# Altium PCB Acoustics_4.PcbDoc
Units mil, origin at the board's own origin, x right, y up, seen from the top; angles counter-clockwise.
Board outline 2756 x 2440 mil, 2 copper layers (Top Layer, Bottom Layer); 113 components, 82 nets, 362 pads, 90 vias.
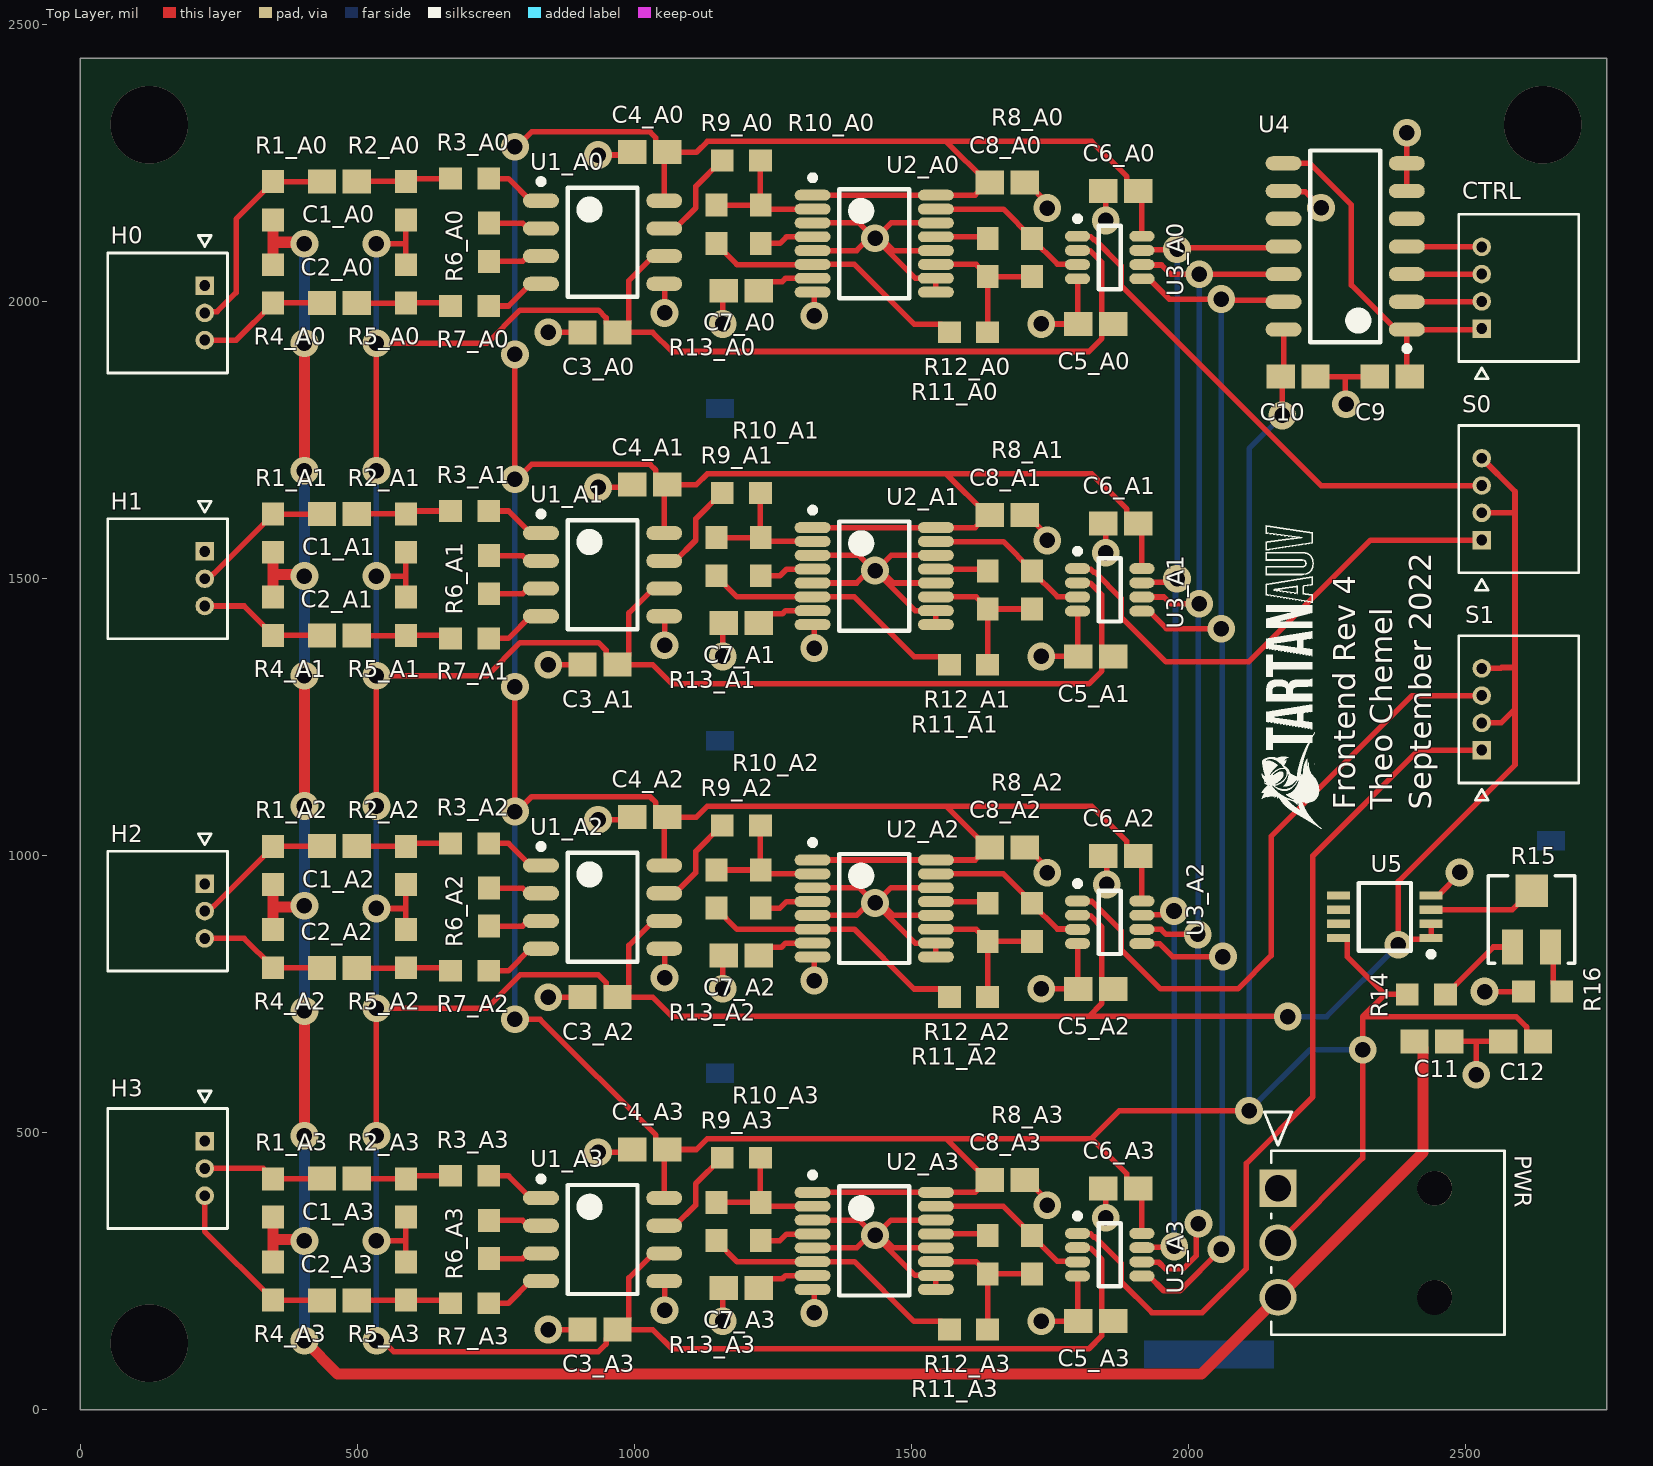
[diagram p0: Top Layer view]
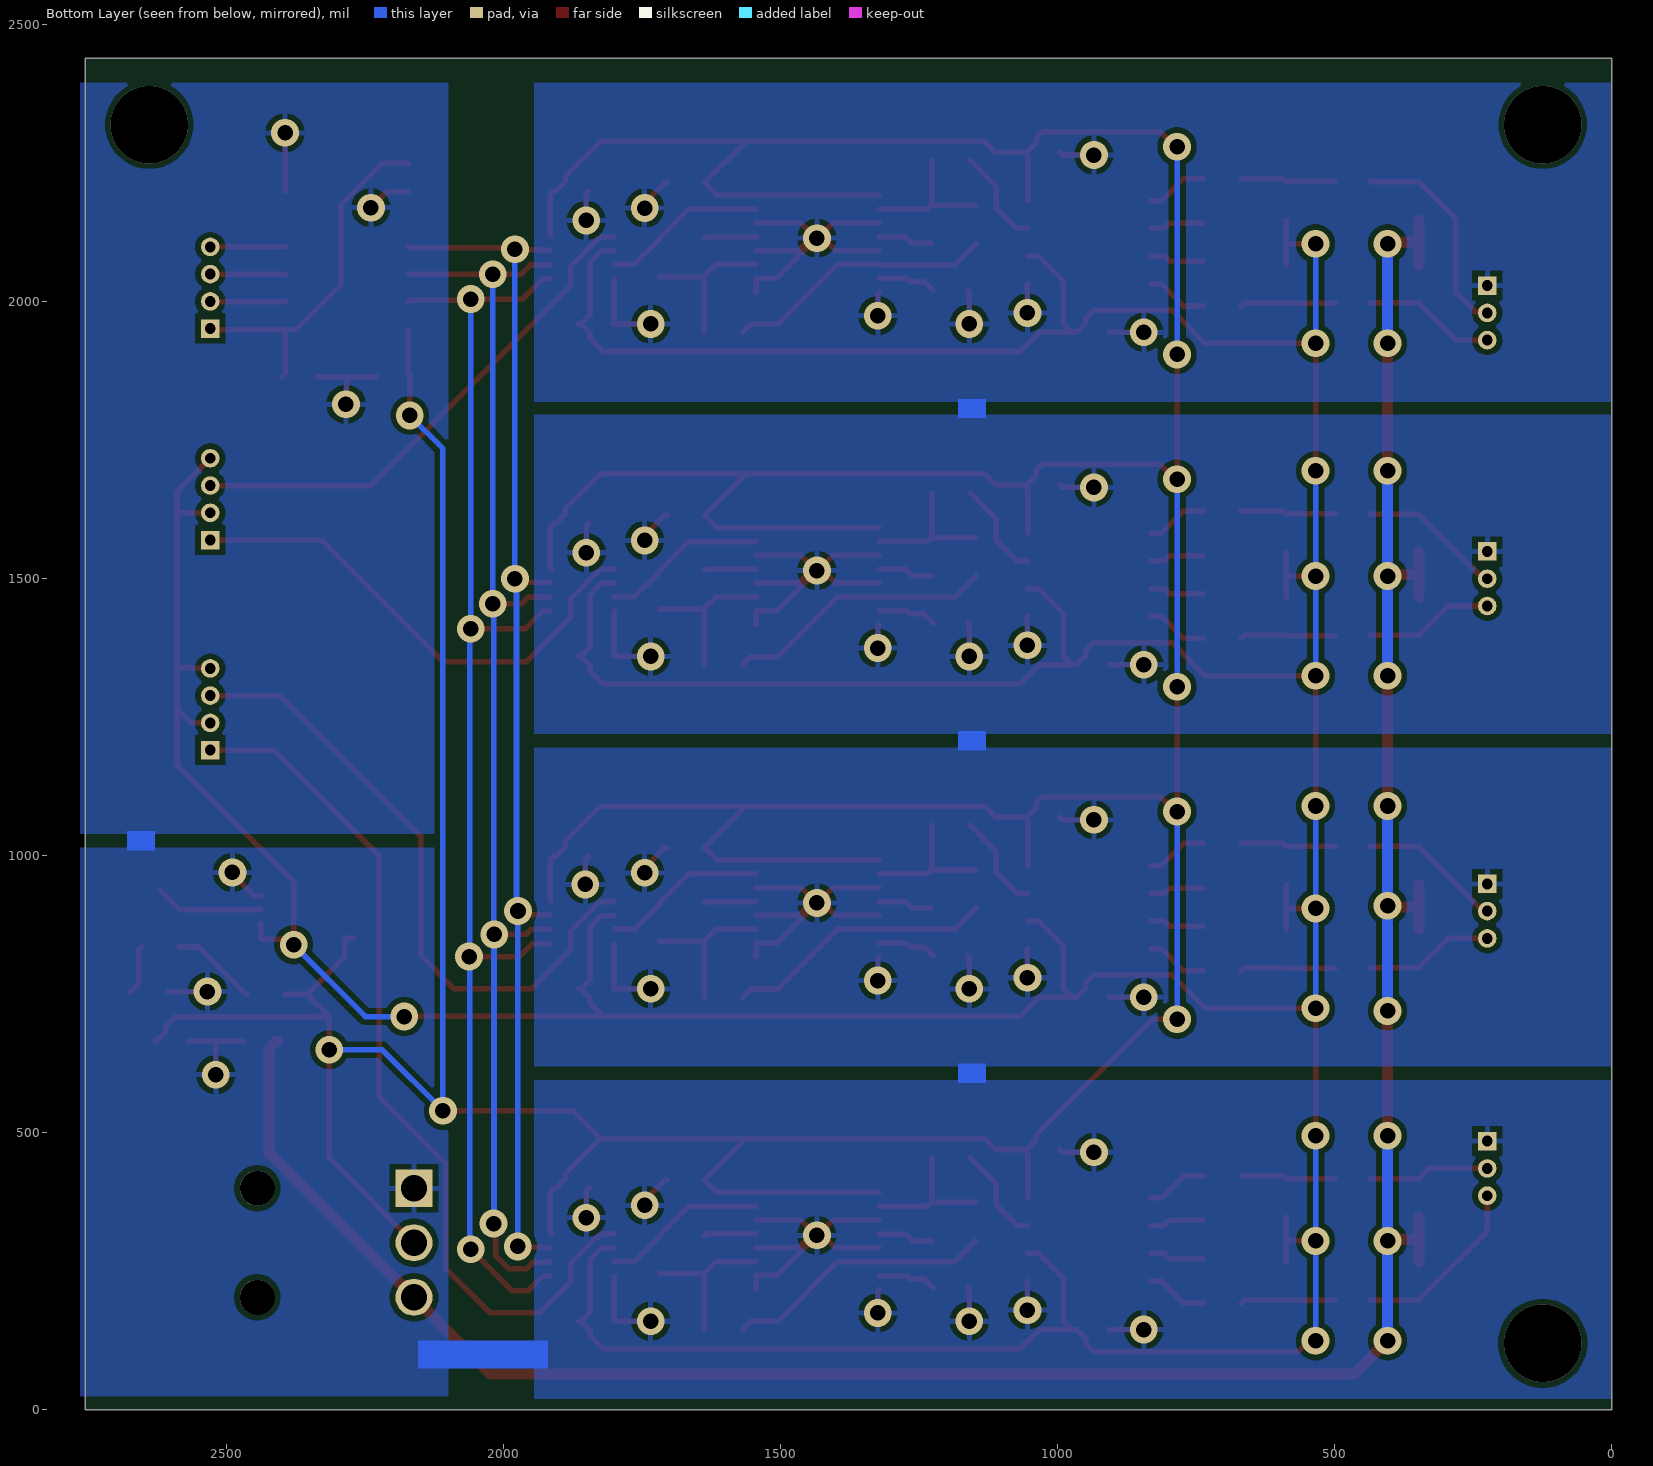
[diagram p1: Bottom Layer view, seen from below]
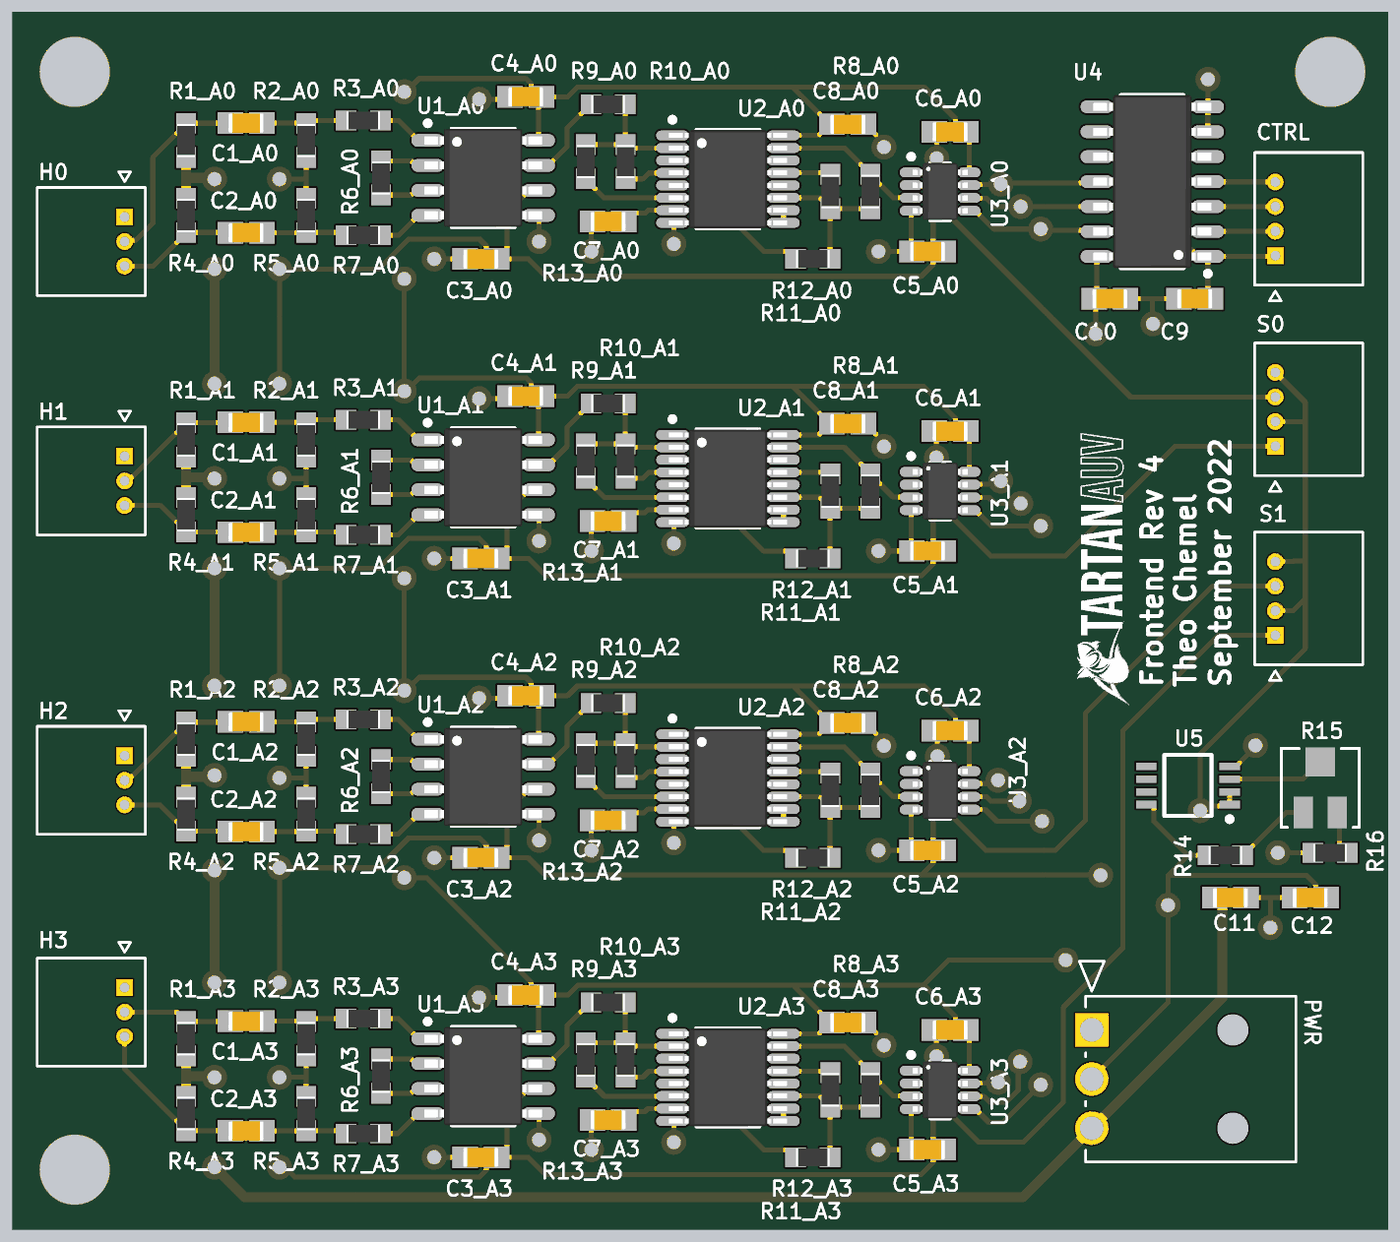
[diagram p2: 3D render of the assembled board from above, using the file's embedded part models]

## Layer stack, top to bottom
Top Solder: solder mask 0.4, Solder Resist, Dk 3.5
Top Layer: signal copper 1.4
Dielectric 1: dielectric 12.6, FR-4, Dk 4.8
Bottom Layer: signal copper 1.4
Bottom Solder: solder mask 0.4, Solder Resist, Dk 3.5

## Board outline
0,0 0,2440 2756,2440 2756,0

## Design rules (kind name [scope] priority, off if disabled: settings)
Clearance [All] p1: gap=10 ignorepadtopadclearanceinfootprint=FALSE except(0: Arc-Hole Track-Hole SMDPad-Hole THPad-Hole Via-Hole Fill-Hole Poly-Hole Region-Hole Text-Hole)
PolygonConnect [All] p1: connectstyle=Relief reliefconductorwidth=10 reliefentries=4 polygonreliefangle="90 Angle" airgapwidth=10
RoomDefinition U_Control [InComponentClass('U_Control')] p1: confinementstyle=ConfineIn formatcopy=TRUE lockcomponents=FALSE outline 2081.97,1040 2751.97,1040 2751.97,2395 2081.97,2395
RoomDefinition A1 [InComponentClass('A1')] p2: confinementstyle=ConfineIn formatcopy=TRUE lockcomponents=FALSE outline 0,1195 2000,1195 2000,1795 0,1795
RoomDefinition A3 [InComponentClass('A3')] p3: confinementstyle=ConfineIn formatcopy=TRUE lockcomponents=FALSE outline 0,-5 2000,-5 2000,595 0,595
RoomDefinition A0 [InComponentClass('A0')] p4: confinementstyle=ConfineIn formatcopy=TRUE lockcomponents=FALSE outline 0,1796.25 2000,1796.25 2000,2396.25 0,2396.25
RoomDefinition A2 [InComponentClass('A2')] p5: confinementstyle=ConfineIn formatcopy=TRUE lockcomponents=FALSE outline 0,595 2000,595 2000,1195 0,1195
RoutingVias [All] p1: holewidth=28 width=50 viastyle="Through Hole" minholewidth=28 minwidth=50 maxholewidth=28 maxwidth=50
SolderMaskExpansion [All] p1: expansion=4 istentingtop=FALSE
Width Width_24 [InNet('+24')] p1: maxlimit=20 minlimit=20 preferedwidth=20 minimp=50.000000 maximp=50.000000 favimp=50.000000
Width [All] p2: maxlimit=10 minlimit=10 preferedwidth=10
30 further rules are at their usual default settings.

## Classes and differential pairs
channel class Amplifier: A0 A1 A2 A3
component class U_Power: C11 C12 U5
component class U_Control: C9 C10 U4
component class A3: C1_A3 C2_A3 C3_A3 C4_A3 C5_A3 C6_A3 C7_A3 C8_A3 R1_A3 R2_A3 R3_A3 R4_A3 R5_A3 R6_A3 R7_A3 R8_A3 R9_A3 R10_A3 R11_A3 R12_A3 R13_A3 U1_A3 U2_A3 U3_A3
component class A2: C1_A2 C2_A2 C3_A2 C4_A2 C5_A2 C6_A2 C7_A2 C8_A2 R1_A2 R2_A2 R3_A2 R4_A2 R5_A2 R6_A2 R7_A2 R8_A2 R9_A2 R10_A2 R11_A2 R12_A2 R13_A2 U1_A2 U2_A2 U3_A2
component class A1: C1_A1 C2_A1 C3_A1 C4_A1 C5_A1 C6_A1 C7_A1 C8_A1 R1_A1 R2_A1 R3_A1 R4_A1 R5_A1 R6_A1 R7_A1 R8_A1 R9_A1 R10_A1 R11_A1 R12_A1 R13_A1 U1_A1 U2_A1 U3_A1
component class A0: C1_A0 C2_A0 C3_A0 C4_A0 C5_A0 C6_A0 C7_A0 C8_A0 R1_A0 R2_A0 R3_A0 R4_A0 R5_A0 R6_A0 R7_A0 R8_A0 R9_A0 R10_A0 R11_A0 R12_A0 R13_A0 U1_A0 U2_A0 U3_A0

## Components (designator, comment, footprint, x,y, rotation, side; value= is the part's Value field where it differs from the comment)
C1_A0 "10nF" CAPC1608X10M 468.21,2217.48 r0 top (schematic designator C1)
C1_A1 "10nF" CAPC1608X10M 468.21,1617.48 r0 top (schematic designator C1)
C1_A2 "10nF" CAPC1608X10M 468.21,1017.48 r0 top (schematic designator C1)
C1_A3 "10nF" CAPC1608X10M 468.21,417.48 r0 top (schematic designator C1)
C2_A0 "10nF" CAPC1608X10M 468.21,1997.48 r0 top (schematic designator C2)
C2_A1 "10nF" CAPC1608X10M 468.21,1397.48 r0 top (schematic designator C2)
C2_A2 "10nF" CAPC1608X10M 468.21,797.48 r0 top (schematic designator C2)
C2_A3 "10nF" CAPC1608X10M 468.21,197.48 r0 top (schematic designator C2)
C3_A0 "100nF" CAPC1608X10M 938.5,1945 r0 top (schematic designator C3)
C3_A1 "100nF" CAPC1608X10M 938.5,1345 r0 top (schematic designator C3)
C3_A2 "100nF" CAPC1608X10M 938.5,745 r0 top (schematic designator C3)
C3_A3 "100nF" CAPC1608X10M 938.5,145 r0 top (schematic designator C3)
C4_A0 "100nF" CAPC1608X10M 1028.5,2270 r0 top (schematic designator C4)
C4_A1 "100nF" CAPC1608X10M 1028.5,1670 r0 top (schematic designator C4)
C4_A2 "100nF" CAPC1608X10M 1028.5,1070 r0 top (schematic designator C4)
C4_A3 "100nF" CAPC1608X10M 1028.5,470 r0 top (schematic designator C4)
C5_A0 "100nF" CAPC1608X10M 1833.5,1960 r0 top (schematic designator C5)
C5_A1 "100nF" CAPC1608X10M 1833.5,1360 r0 top (schematic designator C5)
C5_A2 "100nF" CAPC1608X10M 1833.5,760 r0 top (schematic designator C5)
C5_A3 "100nF" CAPC1608X10M 1833.5,160 r0 top (schematic designator C5)
C6_A0 "100nF" CAPC1608X10M 1878.5,2200 r0 top (schematic designator C6)
C6_A1 "100nF" CAPC1608X10M 1878.5,1600 r0 top (schematic designator C6)
C6_A2 "100nF" CAPC1608X10M 1878.5,1000 r0 top (schematic designator C6)
C6_A3 "100nF" CAPC1608X10M 1878.5,400 r0 top (schematic designator C6)
C7_A0 "100nF" CAPC1608X10M 1193.5,2020 r0 top (schematic designator C7)
C7_A1 "100nF" CAPC1608X10M 1193.5,1420 r0 top (schematic designator C7)
C7_A2 "100nF" CAPC1608X10M 1193.5,820 r0 top (schematic designator C7)
C7_A3 "100nF" CAPC1608X10M 1193.5,220 r0 top (schematic designator C7)
C8_A0 "100nF" CAPC1608X10M 1673.5,2215 r180 top (schematic designator C8)
C8_A1 "100nF" CAPC1608X10M 1673.5,1615 r180 top (schematic designator C8)
C8_A2 "100nF" CAPC1608X10M 1673.5,1015 r180 top (schematic designator C8)
C8_A3 "100nF" CAPC1608X10M 1673.5,415 r180 top (schematic designator C8)
C9 "100nF" CAPC1608X10M 2368.5,1865 r0 top
C10 "100nF" CAPC1608X10M 2198.5,1865 r180 top
C11 "1uF" CAPC1608X10M 2440,665 r180 top
C12 "1uF" CAPC1608X10M 2600,665 r0 top
CTRL "MOLEX_530480450" MOLEX_530480450 2530,1951.57 r90 top
H0 "MOLEX_530480350" MOLEX_530480350 225,2029.21 r270 top
H1 "MOLEX_530480350" MOLEX_530480350 225,1549.41 r270 top
H2 "MOLEX_530480350" MOLEX_530480350 225,949.41 r270 top
H3 "MOLEX_530480350" MOLEX_530480350 225,485 r270 top
PWR "MOLEX_1053131303" MOLEX_1053131303 2162.32,400 r90 top
R1_A0 "1.2K" RESC1608X06M 348.21,2182.48 r270 top (schematic designator R1)
R1_A1 "1.2K" RESC1608X06M 348.21,1582.48 r270 top (schematic designator R1)
R1_A2 "1.2K" RESC1608X06M 348.21,982.48 r270 top (schematic designator R1)
R1_A3 "1.2K" RESC1608X06M 348.21,382.48 r270 top (schematic designator R1)
R2_A0 "1K" RESC1608X06M 588.21,2182.48 r270 top (schematic designator R2)
R2_A1 "1K" RESC1608X06M 588.21,1582.48 r270 top (schematic designator R2)
R2_A2 "1K" RESC1608X06M 588.21,982.48 r270 top (schematic designator R2)
R2_A3 "1K" RESC1608X06M 588.21,382.48 r270 top (schematic designator R2)
R3_A0 "100" RESC1608X06M 703.21,2222.48 r180 top (schematic designator R3)
R3_A1 "100" RESC1608X06M 703.21,1622.48 r180 top (schematic designator R3)
R3_A2 "100" RESC1608X06M 703.21,1022.48 r180 top (schematic designator R3)
R3_A3 "100" RESC1608X06M 703.21,422.48 r180 top (schematic designator R3)
R4_A0 "1.2K" RESC1608X06M 348.21,2032.48 r90 top (schematic designator R4)
R4_A1 "1.2K" RESC1608X06M 348.21,1432.48 r90 top (schematic designator R4)
R4_A2 "1.2K" RESC1608X06M 348.21,832.48 r90 top (schematic designator R4)
R4_A3 "1.2K" RESC1608X06M 348.21,232.48 r90 top (schematic designator R4)
R5_A0 "1K" RESC1608X06M 588.21,2032.48 r90 top (schematic designator R5)
R5_A1 "1K" RESC1608X06M 588.21,1432.48 r90 top (schematic designator R5)
R5_A2 "1K" RESC1608X06M 588.21,832.48 r90 top (schematic designator R5)
R5_A3 "1K" RESC1608X06M 588.21,232.48 r90 top (schematic designator R5)
R6_A0 "50" RESC1608X06M 738.21,2107.48 r90 top (schematic designator R6)
R6_A1 "50" RESC1608X06M 738.21,1507.48 r90 top (schematic designator R6)
R6_A2 "50" RESC1608X06M 738.21,907.48 r90 top (schematic designator R6)
R6_A3 "50" RESC1608X06M 738.21,307.48 r90 top (schematic designator R6)
R7_A0 "100" RESC1608X06M 703.21,1992.48 r180 top (schematic designator R7)
R7_A1 "100" RESC1608X06M 703.21,1392.48 r180 top (schematic designator R7)
R7_A2 "100" RESC1608X06M 703.21,792.48 r180 top (schematic designator R7)
R7_A3 "100" RESC1608X06M 703.21,192.48 r180 top (schematic designator R7)
R8_A0 "51K" RESC1608X06M 1718.5,2080 r90 top (schematic designator R8)
R8_A1 "51K" RESC1608X06M 1718.5,1480 r90 top (schematic designator R8)
R8_A2 "51K" RESC1608X06M 1718.5,880 r90 top (schematic designator R8)
R8_A3 "51K" RESC1608X06M 1718.5,280 r90 top (schematic designator R8)
R9_A0 "51K" RESC1608X06M 1193.5,2255 r180 top (schematic designator R9)
R9_A1 "51K" RESC1608X06M 1193.5,1655 r180 top (schematic designator R9)
R9_A2 "51K" RESC1608X06M 1193.5,1055 r180 top (schematic designator R9)
R9_A3 "51K" RESC1608X06M 1193.5,455 r180 top (schematic designator R9)
R10_A0 "51K" RESC1608X06M 1228.5,2140 r90 top (schematic designator R10)
R10_A1 "51K" RESC1608X06M 1228.5,1540 r90 top (schematic designator R10)
R10_A2 "51K" RESC1608X06M 1228.5,940 r90 top (schematic designator R10)
R10_A3 "51K" RESC1608X06M 1228.5,340 r90 top (schematic designator R10)
R11_A0 "51K" RESC1608X06M 1638.5,2080 r90 top (schematic designator R11)
R11_A1 "51K" RESC1608X06M 1638.5,1480 r90 top (schematic designator R11)
R11_A2 "51K" RESC1608X06M 1638.5,880 r90 top (schematic designator R11)
R11_A3 "51K" RESC1608X06M 1638.5,280 r90 top (schematic designator R11)
R12_A0 "51K" RESC1608X06M 1603.5,1945 r0 top (schematic designator R12)
R12_A1 "51K" RESC1608X06M 1603.5,1345 r0 top (schematic designator R12)
R12_A2 "51K" RESC1608X06M 1603.5,745 r0 top (schematic designator R12)
R12_A3 "51K" RESC1608X06M 1603.5,145 r0 top (schematic designator R12)
R13_A0 "51K" RESC1608X06M 1148.5,2140 r270 top (schematic designator R13)
R13_A1 "51K" RESC1608X06M 1148.5,1540 r270 top (schematic designator R13)
R13_A2 "51K" RESC1608X06M 1148.5,940 r270 top (schematic designator R13)
R13_A3 "51K" RESC1608X06M 1148.5,340 r270 top (schematic designator R13)
R14 "100K" RESC1608X06M 2430,750 r180 top
R15 "20K" TC33X-1_BRN 2620,885 r0 top
R16 "100K" RESC1608X06M 2640,755 r0 top
S0 "MOLEX_530480450" MOLEX_530480450 2530,1570 r90 top
S1 "MOLEX_530480450" MOLEX_530480450 2530,1190.79 r90 top
U1_A0 "AD8221ARZ" SOIC127P600X150-8M 943.21,2107.48 r0 top (schematic designator U1)
U1_A1 "AD8221ARZ" SOIC127P600X150-8M 943.21,1507.48 r0 top (schematic designator U1)
U1_A2 "AD8221ARZ" SOIC127P600X150-8M 943.21,907.48 r0 top (schematic designator U1)
U1_A3 "AD8221ARZ" SOIC127P600X150-8M 943.21,307.48 r0 top (schematic designator U1)
U2_A0 "LTC1563-3IGN#PBF" SOP64P600X175-16M 1433.5,2105 r0 top (schematic designator U2)
U2_A1 "LTC1563-3IGN#PBF" SOP64P600X175-16M 1433.5,1505 r0 top (schematic designator U2)
U2_A2 "LTC1563-3IGN#PBF" SOP64P600X175-16M 1433.5,905 r0 top (schematic designator U2)
U2_A3 "LTC1563-3IGN#PBF" SOP64P600X175-16M 1433.5,305 r0 top (schematic designator U2)
U3_A0 "LTC6910-3CTS8#TRMPBF" TSOP65P280X100-8M 1858.5,2080 r0 top (schematic designator U3)
U3_A1 "LTC6910-3CTS8#TRMPBF" TSOP65P280X100-8M 1858.5,1480 r0 top (schematic designator U3)
U3_A2 "LTC6910-3CTS8#TRMPBF" TSOP65P280X100-8M 1858.5,880 r0 top (schematic designator U3)
U3_A3 "LTC6910-3CTS8#TRMPBF" TSOP65P280X100-8M 1858.5,280 r0 top (schematic designator U3)
U4 "TXS0104EDR" SOIC127P600X175-14M 2283.5,2100 r180 top
U5 "LM358DMR2G" ONSC-MICRO-8-846A-02_H_V 2355,890 r180 top

## Footprints (in the part's own frame and the unit in brackets; to place one, negate y for a bottom-side part, rotate by r counter-clockwise, add the part's x,y. Pads: shape width x height; smd on the part's side, far side on the other; paste and mask are expansions set on the pad)
CAPC1608X10M [mm] "Chip Capacitor, 2-Leads, Body 1.60x0.80mm, IPC Low Density"
  rect 1.3x1.1 smd: 1(-0.8,0) 2(0.8,0)
  body extent -0.9,-0.5 0.9,0.5, height 1
MOLEX_530480350 [mm]
  rect 0.85x0.85 / inner round 0.85 / far side rect 0.85x0.85 hole 0.5 mask+0.076: 1(0,0)
  round 0.85 hole 0.5 mask+0.076: 2(1.25,0) 3(2.5,0)
  silkscreen extent -2.3,-4.45 4,1.05
MOLEX_530480450 [mm]
  rect 0.85x0.85 / inner round 0.85 / far side rect 0.85x0.85 hole 0.5 mask+0.076: 1(0,0)
  round 0.85 hole 0.5 mask+0.076: 2(1.25,0) 3(2.5,0) 4(3.75,0)
  silkscreen extent -2.3,-4.45 5.25,1.05
MOLEX_1053131303 [mm]
  rect 1.7x1.7 hole 1.2 mask+0.076: 1(0,0)
  round 1.7 hole 1.2 mask+0.076: 2(-2.5,0) 3(-5,0)
  round 1.6 hole 1.6 unplated mask+0.076: 4(0,-7.18) 5(-5,-7.18)
  silkscreen extent -6.72,-10.38 3.5,0.64, body extent 0,0 0.25,0.25, height 0.25
ONSC-MICRO-8-846A-02_H_V [mm] "SOIC, 8-Leads, Body 3.1x3.1mm, Pitch 0.65mm"
  rect 1.04x0.38 smd: 1(-2.12,0.975) 2(-2.12,0.325) 3(-2.12,-0.325) 4(-2.12,-0.975) 5(2.12,-0.975) 6(2.12,-0.325) 7(2.12,0.325) 8(2.12,0.975)
  silkscreen extent -2.25,-1.55 1.2,1.84, body extent -1.55,-1.55 1.55,1.55, height 1.1
RESC1608X06M [mm] "Chip Resistor, 2-Leads, Body 1.60x0.80mm, IPC Low Density"
  rect 1.05x1 smd: 1(-0.875,0) 2(0.875,0)
  body extent -0.85,-0.45 0.85,0.45, height 0.55
SOIC127P600X150-8M [mm] "SOIC, 8-Leads, Body 4.90x3.90mm, Pitch 1.27mm, IPC Low Density"
  oval 1.65x0.65 smd: 1(-2.825,1.905) 2(-2.825,0.635) 3(-2.825,-0.635) 4(-2.825,-1.905) 5(2.825,-1.905) 6(2.825,-0.635) 7(2.825,0.635) 8(2.825,1.905)
  silkscreen extent -2.95,-2.5 1.6,2.9, body extent -3,-2.5 3,2.5, height 1.5
SOIC127P600X175-14M [mm] "SOIC, 14-Leads, Body 8.65x3.90mm, Pitch 1.27mm, IPC Low Density"
  oval 1.65x0.65 smd: 1(-2.825,3.81) 2(-2.825,2.54) 3(-2.825,1.27) 4(-2.825,0) 5(-2.825,-1.27) 6(-2.825,-2.54) 7(-2.825,-3.81) 8(2.825,-3.81) 9(2.825,-2.54) 10(2.825,-1.27) 11(2.825,0) 12(2.825,1.27) 13(2.825,2.54) 14(2.825,3.81)
  silkscreen extent -2.95,-4.4 1.6,4.81, body extent -3,-4.4 3,4.4, height 1.75
SOP64P600X175-16M [mm] "SOP, 16-Leads, Body 4.89x3.90mm, Pitch 0.64mm, IPC Low Density"
  oval 1.65x0.5 smd: 1(-2.825,2.222) 2(-2.825,1.587) 3(-2.825,0.953) 4(-2.825,0.318) 5(-2.825,-0.318) 6(-2.825,-0.953) 7(-2.825,-1.587) 8(-2.825,-2.222) 9(2.825,-2.222) 10(2.825,-1.587) 11(2.825,-0.953) 12(2.825,-0.318) 13(2.825,0.318) 14(2.825,0.953) 15(2.825,1.587) 16(2.825,2.222)
  silkscreen extent -2.95,-2.5 1.6,3.15, body extent -3,-2.5 3,2.5, height 1.75
TC33X-1_BRN [mil]
  rect 38x63 smd paste+0 mask+0: 1(-34.25,-49.5) 3(34.25,-49.5)
  rect 59x58 smd paste+0 mask+0: 2(0,52)
  silkscreen extent -78,-79 78,79, body extent 0,0 10,10, height 10
TSOP65P280X100-8M [mm] "TSOP, 8-Leads, Body 2.90x1.63mm, Pitch 0.65mm, IPC Low Density"
  oval 1.15x0.5 smd: 1(-1.475,0.975) 2(-1.475,0.325) 3(-1.475,-0.325) 4(-1.475,-0.975) 5(1.475,-0.975) 6(1.475,-0.325) 7(1.475,0.325) 8(1.475,0.975)
  silkscreen extent -1.6,-1.45 0.5,1.9, body extent -1.4,-1.45 1.4,1.45, height 1

## Part data
C1_A0 C1_A1 C1_A2 C1_A3 C2_A0 C2_A1 C2_A2 C2_A3 C3_A0 C3_A1 C3_A2 C3_A3 C4_A0 C4_A1 C4_A2 C4_A3 C5_A0 C5_A1 C5_A2 C5_A3 C6_A0 C6_A1 C6_A2 C6_A3 C7_A0 C7_A1 C7_A2 C7_A3 C8_A0 C8_A1 C8_A2 C8_A3 C9 C10 C11 C12: library part GRM188, "GRM188 0603(1.6mm*0.8mm) ±5% and ±10% (15pF-2.2uF) SMD Capacitor", LatestRevisionDate=17-Jul-2002, LatestRevisionNote="Re-released for DXP Platform.", PackageDescription="Radial Cap, Thru-Hole; 2 Leads; 0.3 in Pin Spacing", PackageReference=RAD-0.3, Published=8-Jun-2000, Publisher="Altium Limited"
R1_A0 R1_A1 R1_A2 R1_A3 R2_A0 R2_A1 R2_A2 R2_A3 R3_A0 R3_A1 R3_A2 R3_A3 R4_A0 R4_A1 R4_A2 R4_A3 R5_A0 R5_A1 R5_A2 R5_A3 R6_A0 R6_A1 R6_A2 R6_A3 R7_A0 R7_A1 R7_A2 R7_A3 R8_A0 R8_A1 R8_A2 R8_A3 R9_A0 R9_A1 R9_A2 R9_A3 R10_A0 R10_A1 R10_A2 R10_A3 R11_A0 R11_A1 R11_A2 R11_A3 R12_A0 R12_A1 R12_A2 R12_A3 R13_A0 R13_A1 R13_A2 R13_A3 R14 R16: library part RC0603_JR07, "RC0603 JR-07 0603 (1.6mm*0.8mm) ±1% 1% (0R-4.7MR) chip resistor", LatestRevisionDate=17-Jul-2002, LatestRevisionNote="Re-released for DXP Platform.", PackageDescription="Axial Device, Thru-Hole; 2 Leads; 0.3 in Pin Spacing", PackageReference=AXIAL-0.3, Published=8-Jun-2000, Publisher="Altium Limited"
R15: library part TC33X-1-203E, "TRIMMER 20K OHM 0.1W J LEAD TOP", LatestRevisionDate=17-Jul-2002, LatestRevisionNote="Re-released for DXP Platform.", PackageDescription="Variable Resistor, Thru-Hole; 3 Leads", PackageReference=VR5, Published=8-Jun-2000, Publisher="Altium Limited", Set Position=0.5, Sim Note="Enter the Resistance value and the set point into parameter fields."
U1_A0 U1_A1 U1_A2 U1_A3: "IC INST AMP 1 CIRCUIT 8SOIC", ComponentLink1Description="New link", ComponentLink1URL=https://www.analog.com/media/en/technical-documentation/data-sheets/AD8221.pdf
U2_A0 U2_A1 U2_A2 U2_A3: "IC FILTER 256KHZ LOWPASS BESSEL 16SSOP", ComponentLink1Description=Datasheet, ComponentLink1URL=https://www.analog.com/media/en/technical-documentation/data-sheets/156323fa.pdf
U3_A0 U3_A1 U3_A2 U3_A3: "Programmable Gain Amplifier 1 Circuit Rail-to-Rail TSOT-23-8", ComponentLink1Description=Datasheet, ComponentLink1URL=https://www.analog.com/media/en/technical-documentation/data-sheets/6910fb.pdf
U4: "Voltage Level Translator Bidirectional 1 Circuit 4 Channel 24Mbps 14-SOIC", ComponentLink1Description=Datasheet, ComponentLink1URL=https://www.ti.com/general/docs/suppproductinfo.tsp?distId=10&gotoUrl=https%3A%2F%2Fwww.ti.com%2Flit%2Fgpn%2Ftxs0104e
U5: library part CMP-1310-00018-1, "Single Supply Dual Operational Amplifier, 3 to 32 V, 0 to 70 degC, 8-Pin MICRO, Pb-Free, Tape and Reel", Manufacturer="On Semiconductor", ComponentLink1Description="Manufacturer URL", ComponentLink1URL=http://www.onsemi.com/, ComponentLink2Description=Datasheet, ComponentLink2URL=http://www.onsemi.cn/pub_link/Collateral/LM358-D.PDF, ComponentLink3Description="Package Specification", ComponentLink3URL=http://www.onsemi.com/pub_link/Collateral/NLSV2T244-D.PDF, DatasheetVersion="Rev. 27", Mounting Technology="Surface Mount", PackageDescription="8-Pin Small Outline Package, Body 3 x 3 mm, Pitch 0.65 mm", PackageReference=MICRO-8-846A-02_H, PackageVersion="Rev. H", Packing="Tape and Reel", PartNumber=LM358DMR2G, RoHS=TRUE, VCC Max (V)=32, VCC Min (V)=3

## Via types
v1: diameter 50, hole 28, Top Layer to Bottom Layer, tented both sides, 87 vias
v2: diameter 140, hole 140, Top Layer to Bottom Layer, 3 vias

## Nets (pads, with @x,y where several pads share a name; then routed paths per layer and width w, separated by ;. In a path a pad name is that pad's centre, name@x,y a point inside that pad or via, vN(x,y) a via of type N, cw(c..) or ccw(c..) an arc to the next point about the centre after c; other vN are vias at no path point)
+2.5: C3_A0.2 C3_A1.2 C3_A2.2 C3_A3.2 C5_A0.2 C5_A1.2 C5_A2.2 C5_A3.2 R2_A0.2 R2_A1.2 R2_A2.2 R2_A3.2 R5_A0.2 R5_A1.2 R5_A2.2 R5_A3.2 S0.2 S0.4 S1.2 S1.4 U1_A0.6 U1_A1.6 U1_A2.6 U1_A3.6 U3_A0.2 U3_A1.2 U3_A2.2 U3_A3.2 U5.1 U5.2 | length 11455
  Top Layer w10: v1(535,125) 545.82,125 565.82,105 935.47,105 949.41,118.94 949.41,128.35 966.06,145 C3_A3.2@973.94,145 ; v1(535,305) 588.21,305 ; v1(535,495) v1(535,725) 734.13,725 794.13,785 935.47,785 949.41,771.06 949.41,761.65 966.06,745 C3_A2.2 ; v1(535,905) 588.21,905 ; v1(535,1090) v1(535,1325) 734.13,1325 794.13,1385 935.47,1385 949.41,1371.06 949.41,1361.65 966.06,1345 C3_A1.2 ; v1(535,1505) 588.21,1505 ; v1(535,1695) v1(535,1925) 734.13,1925 794.13,1985 935.47,1985 949.41,1971.06 949.41,1961.65 966.06,1945 C3_A0.2 ; v1(535,2105) 588.21,2105 ; R5_A3.2 588.21,305 ; R2_A3.2 588.21,305 ; R5_A2.2 588.21,905 ; R2_A2.2 588.21,905 ; R5_A1.2 588.21,1505 ; R2_A1.2 588.21,1505 ; R5_A0.2 588.21,2105 ; R2_A0.2 588.21,2105 ; U1_A3.6 1034.74,282.48 990.59,238.33 990.59,161.65 C3_A3.2@973.94,145 ; U1_A2.6 1034.74,882.48 990.59,838.33 990.59,761.65 973.94,745 1033.43,745 1068.12,710.31 1820.78,710.31 ; U1_A1.6 1034.74,1482.48 990.59,1438.33 990.59,1361.65 973.94,1345 1033.43,1345 1068.12,1310.31 1820.78,1310.31 1844.41,1333.94 1844.41,1343.35 C5_A1.2@1861.06,1360 ; U1_A0.6 1034.74,2082.48 990.59,2038.33 990.59,1961.65 973.94,1945 1033.43,1945 1068.12,1910.31 1820.78,1910.31 1844.41,1933.94 1844.41,1943.35 C5_A0.2@1861.06,1960 ; U3_A3.2 1801.18,292.05 1823.52,292.05 1844.41,271.16 1844.41,176.65 C5_A3.2@1861.06,160 ; U3_A2.2 1801.18,892.05 1823.52,892.05 1844.41,871.16 1844.41,776.65 C5_A2.2@1861.06,760 ; U3_A1.2 1801.18,1492.05 1823.52,1492.05 1844.41,1471.16 1844.41,1376.65 C5_A1.2@1861.06,1360 ; U3_A0.2 1801.18,2092.05 1823.52,2092.05 1844.41,2071.16 1844.41,1976.65 C5_A0.2@1861.06,1960 ; C5_A3.2 C5_A3.2@1861.06,160 ; C5_A2.2 C5_A2.2@1861.06,760 ; C5_A1.2 C5_A1.2@1861.06,1360 ; C5_A0.2 C5_A0.2@1861.06,1960 ; v1(2180,710) 2179.69,710.31 1820.78,710.31 ; U5.2 U5.1 2435.98,849.13 2422.99,849.13 2389.13,849.13 v1(2379.56,839.56) 2379.56,953.82 2590,1164.26 2590,1265 ; S1.2 2565,1240 2590,1265 ; S1.4 2564.63,1338.43 2566.21,1340 2590,1340 ; S0.2 2565.42,1619.21 2590,1619.21 ; S0.4 2590,1657.64 2590,1619.21 ; C3_A3.2@973.94,145 1033.43,145 1068.12,110.31 1820.78,110.31 1844.41,133.94 1844.41,143.35 C5_A3.2@1861.06,160 ; 1820.78,710.31 1844.41,733.94 1844.41,743.35 C5_A2.2@1861.06,760 ; 2590,1265 2590,1340 ; 2590,1340 2590,1619.21
  Bottom Layer w10: v1(535,125) v1(535,495) ; v1(535,725) v1(535,1090) ; v1(535,1325) v1(535,1695) ; v1(535,1925) v1(535,2105) ; v1(2180,710) 2250,710 v1(2379.56,839.56)
+5: C4_A0.2 C4_A1.2 C4_A2.2 C4_A3.2 C6_A0.2 C6_A1.2 C6_A2.2 C6_A3.2 C8_A0.2 C8_A1.2 C8_A2.2 C8_A3.2 C10.2 C12.2 PWR.2 R14.2 U1_A0.8 U1_A1.8 U1_A2.8 U1_A3.8 U2_A0.1 U2_A0.16 U2_A1.1 U2_A1.16 U2_A2.1 U2_A2.16 U2_A3.1 U2_A3.16 U3_A0.8 U3_A1.8 U3_A2.8 U3_A3.8 U4.14 U5.8 | length 11946.4
  Top Layer w10: v1(785,705) 830.47,705 1039.41,496.06 1039.41,486.65 1056.06,470 C4_A3.2 ; v1(785,1305) v1(785,1080) 788.26,1080 814.91,1106.65 1028.81,1106.65 1039.41,1096.06 1039.41,1086.65 1056.06,1070 C4_A2.2 ; v1(785,1905) v1(785,1680) 788.26,1680 814.91,1706.65 1028.81,1706.65 1039.41,1696.06 1039.41,1686.65 1056.06,1670 C4_A1.2 ; v1(785,2280) 788.26,2280 814.91,2306.65 1028.81,2306.65 1039.41,2296.06 1039.41,2286.65 1056.06,2270 C4_A0.2 ; U1_A3.8 1054.43,464.43 C4_A3.2 ; U1_A2.8 1054.43,1064.43 C4_A2.2 ; U1_A1.8 1054.43,1664.43 C4_A1.2 ; U1_A0.8 1054.43,2264.43 C4_A0.2 ; U2_A3.1 1615.57,392.5 1638.07,415 1563.39,489.69 ; U2_A2.1 1615.57,992.5 1638.07,1015 1563.39,1089.69 ; U2_A1.1 1615.57,1592.5 1638.07,1615 1563.39,1689.69 ; U2_A0.1 1615.57,2192.5 1638.07,2215 1563.39,2289.69 ; U3_A3.8@1914.47,318.39 1916.57,320.49 1916.57,393.43 C6_A3.2 1906.06,400 1889.41,416.65 1889.41,426.06 1825.78,489.69 ; U3_A2.8@1914.47,918.39 1916.57,920.49 1916.57,993.43 C6_A2.2 1906.06,1000 1889.41,1016.65 1889.41,1026.06 1825.78,1089.69 1563.39,1089.69 ; U3_A1.8@1914.47,1518.39 1916.57,1520.49 1916.57,1593.43 C6_A1.2 1906.06,1600 1889.41,1616.65 1889.41,1626.06 1825.78,1689.69 1563.39,1689.69 ; U3_A0.8@1914.47,2118.39 1916.57,2120.49 1916.57,2193.43 C6_A0.2 1906.06,2200 1889.41,2216.65 1889.41,2226.06 1825.78,2289.69 1563.39,2289.69 ; v1(2110,540) 1876.1,540 1825.78,489.69 ; PWR.2 2315,454.25 2315,710 ; v1(2170,1795) 2170,1862.01 C10.2 2172.28,1870.28 U4.14 ; U5.8 2284.53,851.61 2287.01,849.13 2287.01,817.99 2355,750 ; R14.2 2355,750 ; C12.2 2627.56,665 2610.91,681.65 2610.91,691.06 2591.96,710 2315,710 ; C4_A3.2 1112.49,470 1132.17,489.69 1563.39,489.69 ; C4_A2.2 1112.49,1070 1132.17,1089.69 1563.39,1089.69 ; C4_A1.2 1112.49,1670 1132.17,1689.69 1563.39,1689.69 ; C4_A0.2 1112.49,2270 1132.17,2289.69 1563.39,2289.69 ; 1563.39,489.69 1825.78,489.69 ; 2315,710 2355,750
  Bottom Layer w10: v1(785,705) v1(785,1080) ; v1(785,1305) v1(785,1680) ; v1(785,1905) v1(785,2280) ; v1(2170,1795) 2110,1735 v1(2110,540) 2220,650 v1(2315,650)
+24: C11.2 PWR.3 R1_A0.2 R1_A1.2 R1_A2.2 R1_A3.2 R4_A0.2 R4_A1.2 R4_A2.2 R4_A3.2 | length 4954.1
  Top Layer w20: R4_A3.2 348.21,307.48 ; R1_A3.2 348.21,307.48 ; R4_A2.2 348.21,907.48 ; R1_A2.2 348.21,907.48 ; R4_A1.2 348.21,1507.48 ; R1_A1.2 348.21,1507.48 ; R4_A0.2 348.21,2107.48 ; R1_A0.2 348.21,2107.48 ; v1(405,125) 465,65 2024.17,65 PWR.3 2424.09,464.92 2424.09,653.35 2412.44,665 C11.2 ; v1(405,305) 402.52,307.48 348.21,307.48 ; v1(405,495) v1(405,720) ; v1(405,910) 402.48,907.48 348.21,907.48 ; v1(405,1090) v1(405,1325) ; v1(405,1505) 402.52,1507.48 348.21,1507.48 ; v1(405,1695) v1(405,1925) ; v1(405,2105) 402.52,2107.48 348.21,2107.48
  Bottom Layer w20: v1(405,125) v1(405,305) v1(405,495) ; v1(405,720) v1(405,910) v1(405,1090) ; v1(405,1325) v1(405,1505) v1(405,1695) ; v1(405,1925) v1(405,2105)
FILT_OUT_A0: R8_A0.2 U2_A0.15 U3_A0.3 | length 298.4
  Top Layer w10: U2_A0.15 1544.88,2167.34 1666.59,2167.34 1718.5,2115.43 1718.5,2113.46 1764.02,2067.95 1799.69,2067.95 U3_A0.3
FILT_OUT_A1: R8_A1.2 U2_A1.15 U3_A1.3 | length 298.4
  Top Layer w10: U2_A1.15 1544.88,1567.34 1666.59,1567.34 1718.5,1515.43 1718.5,1513.46 1764.02,1467.95 1799.69,1467.95 U3_A1.3
FILT_OUT_A2: R8_A2.2 U2_A2.15 U3_A2.3 | length 298.4
  Top Layer w10: U2_A2.15 1544.88,967.34 1666.59,967.34 1718.5,915.43 1718.5,913.46 1764.02,867.95 1799.69,867.95 U3_A2.3
FILT_OUT_A3: R8_A3.2 U2_A3.15 U3_A3.3 | length 298.4
  Top Layer w10: U2_A3.15 1544.88,367.34 1666.59,367.34 1718.5,315.43 1718.5,313.46 1764.02,267.95 1799.69,267.95 U3_A3.3
GND: C3_A0.1 C3_A1.1 C3_A2.1 C3_A3.1 C4_A0.1 C4_A1.1 C4_A2.1 C4_A3.1 C5_A0.1 C5_A1.1 C5_A2.1 C5_A3.1 C6_A0.1 C6_A1.1 C6_A2.1 C6_A3.1 C7_A0.1 C7_A1.1 C7_A2.1 C7_A3.1 C8_A0.1 C8_A1.1 C8_A2.1 C8_A3.1 C9.1 C10.1 C11.1 C12.1 H0.1 H1.1 H2.1 H3.1 PWR.1 R16.1 U1_A0.5 U1_A1.5 U1_A2.5 U1_A3.5 U2_A0.3 U2_A0.5 U2_A0.8 U2_A0.9 U2_A0.10 U2_A0.12 U2_A0.14 U2_A1.3 U2_A1.5 U2_A1.8 U2_A1.9 U2_A1.10 U2_A1.12 U2_A1.14 U2_A2.3 U2_A2.5 U2_A2.8 U2_A2.9 U2_A2.10 U2_A2.12 U2_A2.14 U2_A3.3 U2_A3.5 U2_A3.8 U2_A3.9 U2_A3.10 U2_A3.12 U2_A3.14 U3_A0.4 U3_A1.4 U3_A2.4 U3_A3.4 U4.6 U4.7 U4.9 U5.4 | length 5441.4
  Top Layer w10: v1(845,145) C3_A3.1 ; v1(845,745) C3_A2.1 ; v1(845,1345) C3_A1.1 ; v1(845,1945) C3_A0.1 ; v1(935,465) 992.01,465 C4_A3.1 ; v1(935,1065) 992.01,1065 C4_A2.1 ; v1(935,1665) 992.01,1665 C4_A1.1 ; v1(935,2265) 992.01,2265 C4_A0.1 ; U1_A3.5 1055,231.91 v1(1055,180) ; U1_A2.5 1055,831.91 v1(1055,780) ; U1_A1.5 1055,1431.91 v1(1055,1380) ; U1_A0.5 1055,2031.91 v1(1055,1980) ; v1(1160,160) 1160,217.99 C7_A3.1 ; v1(1160,760) 1160,817.99 C7_A2.1 ; v1(1160,1360) 1160,1417.99 C7_A1.1 ; v1(1160,1960) 1160,2017.99 C7_A0.1 ; U2_A3.8 1325,214.78 v1(1325,175) ; U2_A3.5 1401.68,292.5 1424.18,315 v1(1435,315) ; U2_A3.3 1405.93,342.5 1433.43,315 v1(1435,315) ; U2_A2.8 1325,814.78 v1(1325,775) ; U2_A2.5 1401.68,892.5 1424.18,915 v1(1435,915) ; U2_A2.3 1405.93,942.5 1433.43,915 v1(1435,915) ; U2_A1.8 1325,1414.78 v1(1325,1375) ; U2_A1.5 1401.68,1492.5 1424.18,1515 v1(1435,1515) ; U2_A1.3 1405.93,1542.5 1433.43,1515 v1(1435,1515) ; U2_A0.8 1325,2014.78 v1(1325,1975) ; U2_A0.5 1401.68,2092.5 1424.18,2115 v1(1435,2115) ; U2_A0.3 1405.93,2142.5 1433.43,2115 v1(1435,2115) ; U2_A3.9 U2_A3.10 1544.57,242.66 1507.34,242.66 v1(1435,315) ; U2_A3.12 1468.32,292.5 1445.82,315 1436.57,315 1464.07,342.5 U2_A3.14 ; U2_A2.9 U2_A2.10 1544.57,842.66 1507.34,842.66 v1(1435,915) ; U2_A2.12 1468.32,892.5 1445.82,915 1436.57,915 1464.07,942.5 U2_A2.14 ; U2_A1.9 U2_A1.10 1544.57,1442.66 1507.34,1442.66 v1(1435,1515) ; U2_A1.12 1468.32,1492.5 1445.82,1515 1436.57,1515 1464.07,1542.5 U2_A1.14 ; U2_A0.9 U2_A0.10 1544.57,2042.66 1507.34,2042.66 v1(1435,2115) ; U2_A0.12 1468.32,2092.5 1445.82,2115 1436.57,2115 1464.07,2142.5 U2_A0.14 ; C8_A3.1 1708.94,415 1745.97,377.97 v1(1745.97,369.24) ; C8_A2.1 1708.94,1015 1745.97,977.97 v1(1745.97,969.24) ; C8_A1.1 1708.94,1615 1745.97,1577.97 v1(1745.97,1569.24) ; C8_A0.1 1708.94,2215 1745.97,2177.97 v1(1745.97,2169.24) ; v1(1735,160) C5_A3.1 1800.43,161.57 U3_A3.4 ; v1(1735,760) C5_A2.1 1800.43,761.57 U3_A2.4 ; v1(1735,1360) C5_A1.1 1800.43,1361.57 U3_A1.4 ; v1(1735,1960) C5_A0.1 1800.43,1961.57 U3_A0.4 ; C6_A3.1 1851.14,395.87 v1(1851.14,347.06) ; C6_A2.1 1853.02,993.99 v1(1853.02,948.43) ; C6_A1.1 1851.14,1595.87 v1(1851.14,1547.06) ; C6_A0.1 1851.58,2195.43 v1(1851.58,2146.81) ; U4.9 2174,2198.28 2211.72,2198.28 v1(2240,2170) ; C10.1 2283.5,1865 ; v1(2285,1815) 2283.5,1816.5 2283.5,1865 ; C9.1 2283.5,1865 ; U4.6 U4.7 2395,2250.28 v1(2395,2305) ; U5.4 2451.46,928.39 2490,966.93 v1(2490,970) ; C11.1 2520,665 ; v1(2520,605) 2520,665 ; v1(2535,755) R16.1 ; C12.1 2520,665
NetC1_A0_1: C1_A0.1 H0.2 R1_A0.1 | length 388.4
  Top Layer w10: H0.2 227.44,1982.44 247.44,1982.44 281.51,2016.51 281.51,2149.25 348.21,2215.95 R1_A0.1 436.16,2216.93 C1_A0.1
NetC1_A0_2: C1_A0.2 R2_A0.1 R3_A0.2 | length 171.6
  Top Layer w10: C1_A0.2 587.66,2217.48 R2_A0.1 593.76,2222.48 R3_A0.2
NetC1_A1_1: C1_A1.1 H1.2 R1_A1.1 | length 260.9
  Top Layer w10: H1.2 231.35,1500.2 240.06,1508.91 241.17,1508.91 348.21,1615.95 R1_A1.1 436.16,1616.93 C1_A1.1
NetC1_A1_2: C1_A1.2 R2_A1.1 R3_A1.2 | length 171.6
  Top Layer w10: C1_A1.2 587.66,1617.48 R2_A1.1 593.76,1622.48 R3_A1.2
NetC1_A2_1: C1_A2.1 H2.2 R1_A2.1 | length 260.9
  Top Layer w10: H2.2 231.35,900.2 240.06,908.91 241.17,908.91 348.21,1015.95 R1_A2.1 436.16,1016.93 C1_A2.1
NetC1_A2_2: C1_A2.2 R2_A2.1 R3_A2.2 | length 171.6
  Top Layer w10: C1_A2.2 587.66,1017.48 R2_A2.1 593.76,1022.48 R3_A2.2
NetC1_A3_1: C1_A3.1 H3.2 R1_A3.1 | length 220.3
  Top Layer w10: H3.2 330.34,435.79 348.21,417.92 R1_A3.1 436.16,416.93 C1_A3.1
NetC1_A3_2: C1_A3.2 R2_A3.1 R3_A3.2 | length 171.6
  Top Layer w10: C1_A3.2 587.66,417.48 R2_A3.1 593.76,422.48 R3_A3.2
NetC2_A0_1: C2_A0.1 H0.3 R4_A0.1 | length 240.4
  Top Layer w10: H0.3 281.94,1930.79 348.21,1997.05 R4_A0.1 436.16,1998.03 C2_A0.1
NetC2_A0_2: C2_A0.2 R5_A0.1 R7_A0.2 | length 171.6
  Top Layer w10: C2_A0.2 587.66,1997.48 R5_A0.1 663.21,1998.03 R7_A0.2
NetC2_A1_1: C2_A1.1 H1.3 R4_A1.1 | length 234.5
  Top Layer w10: H1.3 296.24,1450.99 348.21,1399.02 R4_A1.1 436.16,1398.03 C2_A1.1
NetC2_A1_2: C2_A1.2 R5_A1.1 R7_A1.2 | length 171.6
  Top Layer w10: C2_A1.2 587.66,1397.48 R5_A1.1 663.21,1398.03 R7_A1.2
NetC2_A2_1: C2_A2.1 H2.3 R4_A2.1 | length 234.5
  Top Layer w10: H2.3 296.24,850.99 348.21,799.02 R4_A2.1 436.16,798.03 C2_A2.1
NetC2_A2_2: C2_A2.2 R5_A2.1 R7_A2.2 | length 171.6
  Top Layer w10: C2_A2.2 587.66,797.48 R5_A2.1 663.21,798.03 R7_A2.2
NetC2_A3_1: C2_A3.1 H3.3 R4_A3.1 | length 328.3
  Top Layer w10: H3.3 225,322.23 348.21,199.02 R4_A3.1 436.16,198.03 C2_A3.1
NetC2_A3_2: C2_A3.2 R5_A3.1 R7_A3.2 | length 171.6
  Top Layer w10: C2_A3.2 587.66,197.48 R5_A3.1 663.21,198.03 R7_A3.2
NetC7_A0_2: C7_A0.2 U2_A0.7 | length 106.6
  Top Layer w10: C7_A0.2 1241.65,2036.65 1267.46,2036.65 1273.3,2042.5 U2_A0.7
NetC7_A1_2: C7_A1.2 U2_A1.7 | length 106.6
  Top Layer w10: C7_A1.2 1241.65,1436.65 1267.46,1436.65 1273.3,1442.5 U2_A1.7
NetC7_A2_2: C7_A2.2 U2_A2.7 | length 106.6
  Top Layer w10: C7_A2.2 1240,835 1265.8,835 1273.3,842.5 U2_A2.7
NetC7_A3_2: C7_A3.2 U2_A3.7 | length 106.6
  Top Layer w10: C7_A3.2 1241.65,236.65 1267.46,236.65 1273.3,242.5 U2_A3.7
NetC9_2: C9.2 CTRL.1 U4.1 U4.8 | length 654.6
  Top Layer w10: U4.8 2219.76,2250 2294.86,2174.91 2294.86,2030.18 2375.04,1950 U4.1 ; C9.2 2394.72,1870.28 U4.1 ; CTRL.1 2528.43,1950 U4.1
NetCTRL_2: CTRL.2 U4.2 | length 135.6
  Top Layer w10: U4.2 2395.12,2000.39 2529.61,2000.39 CTRL.2
NetCTRL_3: CTRL.3 U4.3 | length 135.3
  Top Layer w10: U4.3 CTRL.3
NetCTRL_4: CTRL.4 U4.4 | length 135.6
  Top Layer w10: U4.4 2395.12,2099.61 2529.61,2099.61 CTRL.4
NetR3_A0_1: R3_A0.1 U1_A0.1 | length 110.9
  Top Layer w10: R3_A0.1 773.33,2222.48 813.33,2182.48 U1_A0.1
NetR3_A1_1: R3_A1.1 U1_A1.1 | length 110.9
  Top Layer w10: R3_A1.1 773.33,1622.48 813.33,1582.48 U1_A1.1
NetR3_A2_1: R3_A2.1 U1_A2.1 | length 110.9
  Top Layer w10: R3_A2.1 773.33,1022.48 813.33,982.48 U1_A2.1
NetR3_A3_1: R3_A3.1 U1_A3.1 | length 110.9
  Top Layer w10: R3_A3.1 773.33,422.48 813.33,382.48 U1_A3.1
NetR6_A0_1: R6_A0.1 U1_A0.3 | length 97.7
  Top Layer w10: R6_A0.1 798.64,2073.03 808.08,2082.48 U1_A0.3
NetR6_A0_2: R6_A0.2 U1_A0.2 | length 97.7
  Top Layer w10: R6_A0.2 798.64,2141.93 808.08,2132.48 U1_A0.2
NetR6_A1_1: R6_A1.1 U1_A1.3 | length 97.7
  Top Layer w10: R6_A1.1 798.64,1473.03 808.08,1482.48 U1_A1.3
NetR6_A1_2: R6_A1.2 U1_A1.2 | length 97.7
  Top Layer w10: R6_A1.2 798.64,1541.93 808.08,1532.48 U1_A1.2
NetR6_A2_1: R6_A2.1 U1_A2.3 | length 97.7
  Top Layer w10: R6_A2.1 798.64,873.03 808.08,882.48 U1_A2.3
NetR6_A2_2: R6_A2.2 U1_A2.2 | length 97.7
  Top Layer w10: R6_A2.2 798.64,941.93 808.08,932.48 U1_A2.2
NetR6_A3_1: R6_A3.1 U1_A3.3 | length 97.7
  Top Layer w10: R6_A3.1 798.64,273.03 808.08,282.48 U1_A3.3
NetR6_A3_2: R6_A3.2 U1_A3.2 | length 97.7
  Top Layer w10: R6_A3.2 798.64,341.93 808.08,332.48 U1_A3.2
NetR7_A0_1: R7_A0.1 U1_A0.4 | length 110.9
  Top Layer w10: R7_A0.1 773.33,1992.48 813.33,2032.48 U1_A0.4
NetR7_A1_1: R7_A1.1 U1_A1.4 | length 110.9
  Top Layer w10: R7_A1.1 773.33,1392.48 813.33,1432.48 U1_A1.4
NetR7_A2_1: R7_A2.1 U1_A2.4 | length 110.9
  Top Layer w10: R7_A2.1 773.33,792.48 813.33,832.48 U1_A2.4
NetR7_A3_1: R7_A3.1 U1_A3.4 | length 110.9
  Top Layer w10: R7_A3.1 773.33,192.48 813.33,232.48 U1_A3.4
NetR8_A0_1: R8_A0.1 R11_A0.1 R12_A0.2 U2_A0.11 | length 284.2
  Top Layer w10: U2_A0.11 1617.54,2067.5 1638.5,2046.54 R11_A0.1 ; R12_A0.2 1637.95,2045 R11_A0.1 ; R8_A0.1 R11_A0.1
NetR8_A1_1: R8_A1.1 R11_A1.1 R12_A1.2 U2_A1.11 | length 284.2
  Top Layer w10: U2_A1.11 1617.54,1467.5 1638.5,1446.54 R11_A1.1 ; R12_A1.2 1637.95,1445 R11_A1.1 ; R8_A1.1 R11_A1.1
NetR8_A2_1: R8_A2.1 R11_A2.1 R12_A2.2 U2_A2.11 | length 284.2
  Top Layer w10: U2_A2.11 1617.54,867.5 1638.5,846.54 R11_A2.1 ; R12_A2.2 1637.95,845 R11_A2.1 ; R8_A2.1 R11_A2.1
NetR8_A3_1: R8_A3.1 R11_A3.1 R12_A3.2 U2_A3.11 | length 284.2
  Top Layer w10: U2_A3.11 1617.54,267.5 1638.5,246.54 R11_A3.1 ; R12_A3.2 1637.95,245 R11_A3.1 ; R8_A3.1 R11_A3.1
NetR9_A0_1: R9_A0.1 R10_A0.2 R13_A0.1 U2_A0.2 | length 256.3
  Top Layer w10: R13_A0.1 1227.4,2174.45 1227.95,2175 R9_A0.1 ; R10_A0.2 1235.45,2167.5 U2_A0.2
NetR9_A1_1: R9_A1.1 R10_A1.2 R13_A1.1 U2_A1.2 | length 256.3
  Top Layer w10: R13_A1.1 1227.4,1574.45 1227.95,1575 R9_A1.1 ; R10_A1.2 1235.45,1567.5 U2_A1.2
NetR9_A2_1: R9_A2.1 R10_A2.2 R13_A2.1 U2_A2.2 | length 256.3
  Top Layer w10: R13_A2.1 1227.4,974.45 1227.95,975 R9_A2.1 ; R10_A2.2 1235.45,967.5 U2_A2.2
NetR9_A3_1: R9_A3.1 R10_A3.2 R13_A3.1 U2_A3.2 | length 256.3
  Top Layer w10: R13_A3.1 1227.4,374.45 1227.95,375 R9_A3.1 ; R10_A3.2 1235.45,367.5 U2_A3.2
NetR10_A0_1: R10_A0.1 U2_A0.4 | length 98.7
  Top Layer w10: R10_A0.1 1263.28,2105.55 1275.08,2117.34 1322.13,2117.34 U2_A0.4
NetR10_A1_1: R10_A1.1 U2_A1.4 | length 98.7
  Top Layer w10: R10_A1.1 1263.28,1505.55 1275.08,1517.34 1322.13,1517.34 U2_A1.4
NetR10_A2_1: R10_A2.1 U2_A2.4 | length 98.7
  Top Layer w10: R10_A2.1 1263.28,905.55 1275.08,917.34 1322.13,917.34 U2_A2.4
NetR10_A3_1: R10_A3.1 U2_A3.4 | length 98.7
  Top Layer w10: R10_A3.1 1263.28,305.55 1275.08,317.34 1322.13,317.34 U2_A3.4
NetR11_A0_2: R11_A0.2 U2_A0.13 | length 95
  Top Layer w10: U2_A0.13 1635.45,2117.5 R11_A0.2
NetR11_A1_2: R11_A1.2 U2_A1.13 | length 95
  Top Layer w10: U2_A1.13 1635.45,1517.5 R11_A1.2
NetR11_A2_2: R11_A2.2 U2_A2.13 | length 95
  Top Layer w10: U2_A2.13 1635.45,917.5 R11_A2.2
NetR11_A3_2: R11_A3.2 U2_A3.13 | length 95
  Top Layer w10: U2_A3.13 1635.45,317.5 R11_A3.2
NetR12_A0_1: R12_A0.1 R13_A0.2 U2_A0.6 | length 487.8
  Top Layer w10: R13_A0.2 1148.5,2104.57 1185.73,2067.34 1322.13,2067.34 U2_A0.6 1397.48,2067.5 1505.3,1959.69 1554.37,1959.69 R12_A0.1
NetR12_A1_1: R12_A1.1 R13_A1.2 U2_A1.6 | length 487.8
  Top Layer w10: R13_A1.2 1148.5,1504.57 1185.73,1467.34 1322.13,1467.34 U2_A1.6 1397.48,1467.5 1505.3,1359.69 1554.37,1359.69 R12_A1.1
NetR12_A2_1: R12_A2.1 R13_A2.2 U2_A2.6 | length 487.8
  Top Layer w10: R13_A2.2 1148.5,904.57 1185.73,867.34 1322.13,867.34 U2_A2.6 1397.48,867.5 1505.3,759.69 1554.37,759.69 R12_A2.1
NetR12_A3_1: R12_A3.1 R13_A3.2 U2_A3.6 | length 487.8
  Top Layer w10: R13_A3.2 1148.5,304.57 1185.73,267.34 1322.13,267.34 U2_A3.6 1397.48,267.5 1505.3,159.69 1554.37,159.69 R12_A3.1
NetR14_1: R14.1 R15.1 | length 156.7
  Top Layer w10: R14.1 2465.43,750 2550.93,835.5 R15.1
NetR15_2: R15.3 R16.2 | length 89.4
  Top Layer w10: R15.3 2658.78,830.97 2658.78,769.69 2673.46,755 R16.2
NetR15_3: R15.2 U5.3 | length 195.7
  Top Layer w10: U5.3 2585.3,902.8 2619.5,937 R15.2
NetS0_1: S0.1 U3_A1.1 | length 910.1
  Top Layer w10: U3_A1.1 1801.18,1517.64 1824,1517.64 1829.59,1512.05 1831.8,1512.05 1878.94,1464.91 1878.94,1431.32 1960.26,1350 2109.26,1350 2329.26,1570 S0.1
NetS0_3: S0.3 U3_A0.1 | length 936.7
  Top Layer w10: U3_A0.1 1801.18,2117.64 1824.19,2117.64 1829.78,2112.05 1831.8,2112.05 1878.94,2064.91 1878.94,2029.49 2240.01,1668.43 S0.3
NetS1_1: S1.1 U3_A3.1 | length 1595.1
  Top Layer w10: U3_A3.1 1801.18,317.64 1824,317.64 1829.59,312.05 1831.8,312.05 1878.94,264.91 1878.94,231.32 1934.77,175.49 2025.49,175.49 2105,255 2105,445 2225,565 2225,1000 2415.79,1190.79 S1.1
NetS1_3: S1.3 U3_A2.1 | length 1160
  Top Layer w10: U3_A2.1 1801.18,917.64 1826.21,917.64 1878.94,864.91 1878.94,831.32 1950.26,760 2090,760 2150,820 2150,1035 2404.21,1289.21 S1.3
NetU3_A0_5: U3_A0.5 U3_A1.5 U3_A2.5 U3_A3.5 U4.13 | length 2489.2
  Top Layer w10: U3_A3.5 1929.37,241.61 1955.98,215 1985,215 v1(2060,290) ; U3_A2.5 1948.53,841.61 1971.92,818.23 v1(2062.8,818.23) ; U3_A1.5 1929.37,1441.61 1960.98,1410 v1(2060,1410) ; U3_A0.5 1929.37,2041.61 1965.98,2005 v1(2060,2005) 2062.5,2002.5 2169.78,2002.5 U4.13
  Bottom Layer w10: v1(2060,290) 2061.4,291.4 2061.4,814.47 2063.98,817.05 2061.4,819.63 2061.4,1408.6 v1(2060,1410) v1(2060,2005)
NetU3_A0_6: U3_A0.6 U3_A1.6 U3_A2.6 U3_A3.6 U4.12 | length 2363.1
  Top Layer w10: U3_A3.6 1917.32,266.46 1946.97,266.46 1958.43,255 1991.57,255 2015,278.43 2015,332.66 v1(2018.58,336.24) ; U3_A2.6 1951.23,867.2 1960.2,858.23 v1(2017.16,858.23) ; U3_A1.6 1956.23,1467.2 1968.43,1455 v1(2020,1455) ; U3_A0.6 1917.32,2066.46 1951.97,2066.46 1968.43,2050 v1(2020,2050) U4.12
  Bottom Layer w10: v1@2015.19,860.19 2018.58,863.58 2018.58,1442.76 2020,1444.18 v1(2020,1455) v1(2020,2050) ; v1(2017.16,858.23) 2018.58,856.81 2017.87,856.1 2017.87,336.95 v1(2018.58,336.24)
NetU3_A0_7: U3_A0.7 U3_A1.7 U3_A2.7 U3_A3.7 U4.11 | length 2246.7
  Top Layer w10: U3_A3.7 1932.74,292.8 1933.84,293.9 1973.9,293.9 v1(1975,295) ; U3_A2.7 1917.32,893.54 1967.63,893.54 v1(1974.54,900.46) ; U3_A1.7 1917.32,1493.54 1973.54,1493.54 v1(1980,1500) ; U3_A0.7 1932.74,2092.8 1933.84,2093.9 v1@1978.9,2093.9 ; v1(1980,2095) 1982.5,2097.5 2169.78,2097.5 U4.11
  Bottom Layer w10: v1(1974.54,900.46) 1974.77,900.23 1974.77,295.23 v1(1975,295) ; v1@1975,900 1977.27,902.27 1977.27,1497.27 v1(1980,1500) v1(1980,2095)
PRE_OUT_A0: R9_A0.2 U1_A0.7 | length 178
  Top Layer w10: U1_A0.7 1074.11,2132.48 1111.3,2169.67 1111.3,2208.23 1158.07,2255 R9_A0.2
PRE_OUT_A1: R9_A1.2 U1_A1.7 | length 178
  Top Layer w10: U1_A1.7 1074.11,1532.48 1111.3,1569.67 1111.3,1608.22 1158.07,1655 R9_A1.2
PRE_OUT_A2: R9_A2.2 U1_A2.7 | length 178
  Top Layer w10: U1_A2.7 1074.11,932.48 1111.3,969.67 1111.3,1008.22 1158.07,1055 R9_A2.2
PRE_OUT_A3: R9_A3.2 U1_A3.7 | length 178
  Top Layer w10: U1_A3.7 1074.11,332.48 1111.3,369.67 1111.3,408.22 1158.07,455 R9_A3.2
pads on no net: PWR.4 PWR.5 U4.5 U4.10 U5.5 U5.6 U5.7
copper on no net:
  other v2: 125,120 125,2320 2640,2320

## Polygon pours and split planes (outlines as drawn)
GND on Bottom Layer "GND_L02_P004" (solid, remove dead copper, pour order 4): 2100,1015 2765,1015 2765,25 2100,25
GND on Bottom Layer "GND_L02_P005" (solid, remove dead copper, pour order 5): 2100,2395 2765,2395 2765,1040 2100,1040
GND on Bottom Layer "GND_L02_P003" (solid, remove dead copper, pour order 3): 0,595 1945,595 1945,20 0,20
GND on Bottom Layer "GND_L02_P000" (solid, remove dead copper, pour order 0): 0,2395 1945,2395 1945,1820 0,1820
GND on Bottom Layer "GND_L02_P002" (solid, remove dead copper, pour order 2): 0,1195 1945,1195 1945,620 0,620
GND on Bottom Layer "GND_L02_P001" (solid, remove dead copper, pour order 1): 0,1795.73 1945,1795.73 1945,1220.73 0,1220.73

## Other copper
Bottom Layer:
  rectangle net GND: 2630,1010 2680,1045
  region net GND: 2155,75 2155,125 1920,125 1920,75
  rectangle net GND: 1130,590 1180,625
  rectangle net GND: 1130,1190 1180,1225
  rectangle net GND: 1130,1790 1180,1825

## Silkscreen, mask and mechanical layers (free items; w line width, h text height)
Top Overlay:
  drawing of 29 lines, arcs and shapes, not listed
  text "Frontend Rev 4" at 2302,1083 h40 r90
  text "Theo Chemel" at 2368.67,1083 h40 r90
  text "September 2022" at 2438.67,1083 h40 r90
Mechanical 1:
  lines w10: 5,0 2761,0 2761,2440 5,2440 5,0